# Altium PCB RT-701_V005.PcbDoc (part 2 of 2)
Units mm, origin at the board's own origin, x right, y up, seen from the top; angles counter-clockwise.
Board outline 41.11 x 25.65 mm, 4 copper layers (Top Layer, Signal Layer 1, Signal Layer 2, Bottom Layer), stack 0.777 mm thick; 76 components, 63 nets, 332 pads, 90 vias.
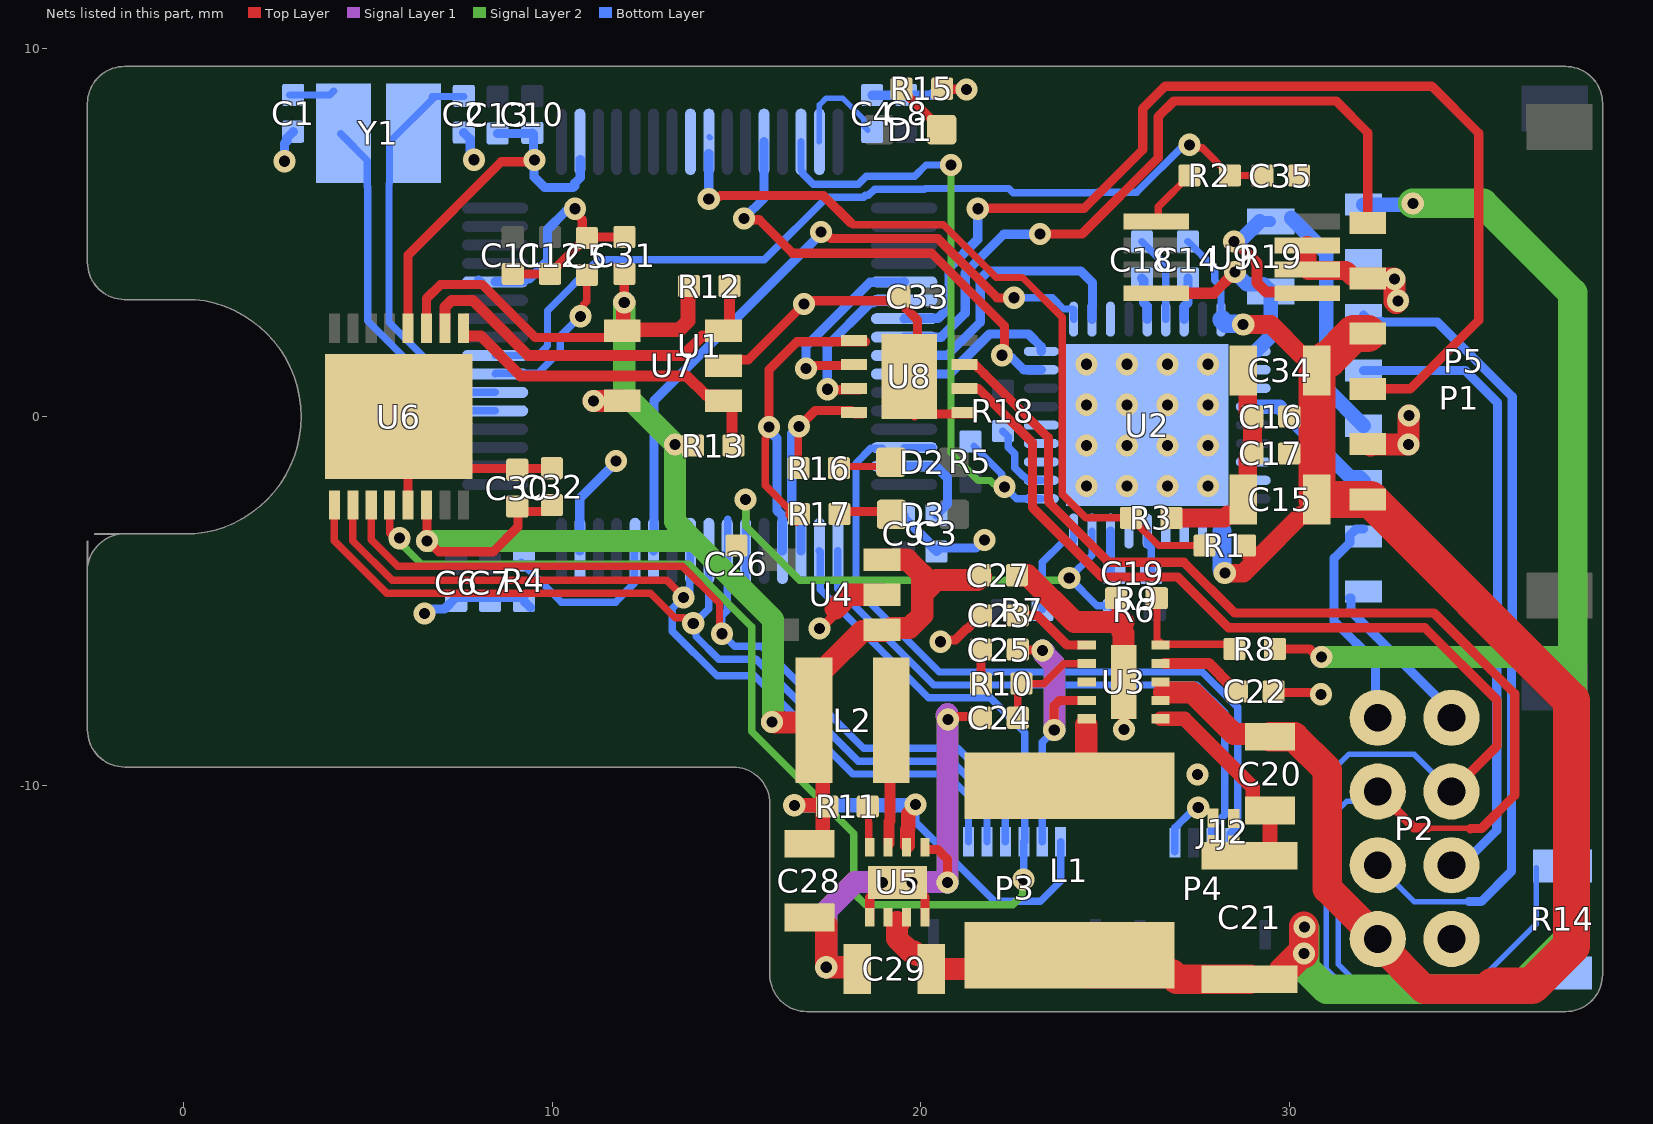
[diagram p4: the nets of this part, all layers, seen from the top]

## Via types
v1: diameter 0.6, hole 0.3, Top Layer to Bottom Layer, tented both sides, 90 vias

## Nets (pads, with @x,y where several pads share a name; then routed paths per layer and width w, separated by ;. In a path a pad name is that pad's centre, name@x,y a point inside that pad or via, vN(x,y) a via of type N, cw(c..) or ccw(c..) an arc to the next point about the centre after c; other vN are vias at no path point) (continued)
5V0: C27.1 C28.1 C30.1 C31.1 C32.1 L2.2 P3.1 R11.1 R12.2 R13.2 U4.1 U4.3 U5.6 U6.3 U6.14 U7.4 | length 62
  Top Layer w0.25: U6.3@6.59,2.4 6.59,3.202 6.972,3.584 8.1,3.584 9.539,2.145 U7.4@11.701,2.145 ; 6.601,-3.062 U6.14@6.601,-2.338 ; v1@6.712,-3.452 6.926,-3.666 8.4,-3.666 9.072,-2.994 9.072,-2.579 9.893,-2.579 C32.1@10.068,-2.404 ; C30.1@9.052,-2.571 C30.1@9.052,-2.444 ; C31.1@11.895,3.795 11.954,3.736 v1(11.954,3.092)
  Top Layer w0.4: U7.4@11.701,2.328 U7.4@11.901,2.328 11.929,2.356 13.449,2.356 13.683,2.591 13.683,3.515 R12.2@13.707,3.539 ; U7.4@11.828,2.328 11.928,2.428 11.928,3.065 v1(11.954,3.092) ; v1(13.335,-0.762) 13.349,-0.776 13.804,-0.776 R13.2@13.817,-0.789 ; v1@16.57,-10.547 R11.1@17.341,-10.547 ; C28.1@16.978,-11.595 17.227,-11.595 17.341,-11.48 R11.1@17.341,-10.547 ; L2.2@17.296,-8.992 17.341,-9.038 R11.1@17.341,-10.547 ; R11.1@17.462,-10.584 17.426,-10.547 R11.1@17.341,-10.547 ; U5.6@19.639,-11.641 19.639,-11.203 19.662,-11.18 19.662,-10.777 19.862,-10.577 v1(19.862,-10.523)
  Top Layer w0.6: v1(15.965,-8.285) 16.035,-8.285 16.05,-8.3 17.042,-8.3 L2.2@17.099,-8.244 17.099,-7.044 17.299,-6.844 17.39,-6.844 18.418,-5.816 U4.1@19.025,-5.816 ; U4.3@18.944,-3.887 19.635,-3.887 20.041,-4.292 20.041,-4.816 ; U4.1@19.189,-5.742 19.689,-5.742 20.041,-5.39 20.041,-4.816 ; C27.1@21.638,-4.335 21.54,-4.433 20.423,-4.433 20.041,-4.816
  Signal Layer 2 w0.6: v1(6.604,-3.381) 13.865,-3.381 ; v1(11.954,3.092) 11.954,0.628 v1@13.307,-0.724 ; v1(13.335,-0.762) 13.335,-2.851 13.865,-3.381 ; v1(15.965,-8.285) 15.992,-8.258 15.992,-5.508 13.865,-3.381
  Bottom Layer w0.2: v1(19.862,-10.523) 19.862,-11.009 22.003,-13.15 23.25,-13.15 23.797,-12.603 P3.1@23.797,-11.534
  Bottom Layer w0.4: v1(16.569,-10.548) 19.837,-10.548 v1(19.862,-10.523)
12V0: C21.1 C29.1 L1.2 P1.1 R8.2 U5.2 U5.3 | length 52.1
  Top Layer w0.25: R8.2@29.613,-6.307 30.555,-6.307 30.777,-6.53 v1(30.872,-6.53)
  Top Layer w0.6: 19.4,-13.764 19.354,-13.717 19.354,-14.168 19.705,-14.52 19.814,-14.52 19.907,-14.612 20.207,-14.612 20.282,-14.687 C29.1@20.282,-14.987 21.481,-14.987 21.631,-14.837 L1.2@21.631,-14.525 ; v1(30.398,-14.573) v1@30.398,-14.554
  Top Layer w0.8: L1.2@24.031,-14.622 24.531,-15.122 26.806,-15.122 26.95,-15.265 C21.1@28.922,-15.265 ; C21.1@29.822,-15.24 29.822,-15.067 30.316,-14.573 v1(30.398,-14.573) ; v1@30.398,-14.554 v1@30.398,-13.831
  Signal Layer 2 w0.6: v1(30.872,-6.53) 37.449,-6.53 37.667,-6.312
  Signal Layer 2 w0.8: v1@30.426,-13.884 30.426,-14.573 30.426,-14.96 31.012,-15.546 36.199,-15.546 37.688,-14.058 37.688,-6.53 37.688,3.357 35.262,5.783 v1(33.351,5.783)
  Bottom Layer w0.4: P1.1@32.014,5.75 33.319,5.75 v1(33.351,5.783)
  other v1: 30.411,-13.851
AD8418_1: R2.1 U9.5 | length 1.6
  Top Layer w0.2: U9.5@26.395,5.295 26.444,5.344 26.444,5.694 R2.1@27.292,6.542
AD8418_1_SENSE1: C35.1 R2.2 U1.8 | length 24.2
  Top Layer w0.2: v1(27.292,7.374) 27.369,7.297 27.637,7.297 R2.2@28.392,6.542 29.262,6.542 C35.1@29.266,6.538
  Bottom Layer w0.2: U1.8@8.45,1.655 9.605,1.655 9.871,1.922 9.871,2.871 11.25,4.25 15.75,4.25 17.455,5.955 18.45,5.955 18.495,6 18.579,6 18.75,6.171 20.098,6.171 20.116,6.189 20.685,6.189 22.392,6.189 22.504,6.076 24.78,6.076 24.795,6.091 25.865,6.091 27.147,7.374 v1(27.292,7.374)
BOOT0: R4.2 U1.60 | length 4.6
  Bottom Layer w0.2: R4.2@9.161,-3.954 10.241,-5.034 11.719,-5.034 12.231,-4.523 12.231,-3.664 U1.60@12.25,-3.645
COMP: C24.1 R10.2 U3.7 | length 3.1
  Top Layer w0.2: C24.1@22.632,-8.174 22.632,-7.199 R10.2@22.657,-7.174 ; R10.2@22.732,-7.248 23.333,-7.248 23.877,-6.705 U3.7@24.603,-6.705
DRV8313_1_EN1: U1.59 U2.1 | length 18.5
  Top Layer w0.25: v1(17.296,5.008) 17.39,5.008 17.565,4.833 20.463,4.833 22.076,3.22 22.531,3.22 v1(22.535,3.223)
  Bottom Layer w0.2: v1@22.543,3.231 v1(22.535,3.223) 23.568,3.223 23.872,2.919 24.124,2.919 24.147,2.896 U2.1@24.147,2.644
  Bottom Layer w0.25: U1.59@12.75,-3.645 12.76,-3.635 12.76,-2.35 12.76,0.43 17.296,4.966 v1(17.296,5.008)
DRV8313_1_EN2: U1.28 U2.35 | length 12.5
  Top Layer w0.25: v1(15.2,5.378) 15.238,5.34 15.617,5.34 16.524,4.433 20.297,4.433 22.276,2.454 v1@22.276,1.84
  Bottom Layer w0.25: v1(15.2,5.378) 15.75,5.928 U1.28@15.75,7.455 ; v1@22.169,1.702 v1(22.207,1.663) 22.274,1.596 22.47,1.596 22.797,1.269 U2.35@23.272,1.269
DRV8313_1_FAULT: R5.2 U1.30 U2.28 | length 17.5
  Signal Layer 2 w0.2: v1(20.82,6.824) 20.82,0.106 20.82,-0.991 21.565,-1.736 21.89,-1.736 21.985,-1.83 22.198,-1.83 v1(22.274,-1.906)
  Bottom Layer w0.2: U1.30@16.75,7.455 16.75,6.678 16.8,6.628 16.8,6.589 17.084,6.305 18.305,6.305 18.521,6.521 19.839,6.521 20.142,6.824 v1(20.82,6.824) ; R5.2@21.447,-0.806 22.198,-1.558 22.198,-1.83 v1(22.274,-1.906) 22.599,-2.231 U2.28@23.272,-2.231
DRV8313_1_IN1: U1.41 U2.2 | length 7.9
  Bottom Layer w0.254: U1.41@19.55,1.655 19.559,1.664 20.717,1.664 21.614,2.561 21.614,3.731 21.833,3.95 24.339,3.95 24.66,3.629 24.66,3.002 24.647,2.99 U2.2@24.647,2.644
DRV8313_1_IN2: U1.42 U2.36 | length 4.4
  Bottom Layer w0.254: U1.42@19.55,1.155 20.78,1.155 21.865,2.24 22.926,2.24 23.272,1.894 U2.36@23.272,1.769
DRV8313_1_RESET: R6.2 U1.54 U2.26 | length 15.5
  Signal Layer 2 w0.2: v1(15.25,-2.25) 15.25,-2.971 16.719,-4.44 23.968,-4.44 v1(24.03,-4.378)
  Bottom Layer w0.2: U1.54@15.2,-4.472 15.25,-4.422 U1.54@15.25,-3.645 v1(15.25,-2.25) ; U2.26@24.647,-3.106 24.647,-3.761 v1(24.03,-4.378) 24.781,-5.13 25.13,-5.13 R6.2@25.25,-5.25
FB/VO: R8.1 R9.2 U3.5 | length 3.2
  Top Layer w0.2: R9.2@26.428,-5.007 26.409,-5.027 26.409,-6.118 U3.5@26.506,-6.118 ; U3.5@26.506,-6.176 28.313,-6.176 28.407,-6.271 R8.1@28.407,-6.339
GND: C1.1 C2.1 C3.2 C4.2 C5.2 C6.2 C7.2 C8.2 C9.2 C10.2 C11.2 C12.2 C13.2 C15.2 C16.2 C17.2 C19.2 C22.2 C23.2 C24.2 C25.2 C26.2 C27.2 C28.2 C29.2 C30.2 C31.2 C32.2 C33.2 C34.2 C35.2 J1.1 J2.1 P1.2 P2.2 P3.2 P4.4 P5.2 P5.5 R3.1 R4.1 R9.1 R15.1 U1.12 U1.18 U1.63 U2.3 U2.11 U2.12 U2.16 U2.17 U2.20 U2.21 U2.22 U2.23 U2.24 U2.30 U2.31 U2.32 U2.37 U3.9 U3.11 U4.2 U5.1 U5.4 U5.5 U5.9 U6.4 U6.13 U6.17 U7.2 U7.5 U8.5 U8.9 U9.2 U9.3 | length 97.9
  Top Layer w0.25: U6.17@5.84,0 7.25,-1.41 C32.2@10.134,-1.41 ; U6.13@6.09,-2.4 6.09,-1.359 U6.17@6.158,-1.291 ; U6.4@6.09,2.4 6.09,4.385 8.618,6.914 9.263,6.914 v1@9.359,7.01 ; C11.2@8.931,3.872 C12.2@9.94,3.872 10.738,4.669 10.765,4.669 C5.2@10.94,4.844 ; v1(10.613,5.639) 10.613,5.544 10.818,5.34 10.818,4.966 C5.2@10.94,4.844 ; C31.2@11.959,4.872 10.967,4.872 C5.2@10.94,4.844 ; U7.2@14.651,1.378 14.814,1.541 15.318,1.541 16.896,3.119 v1@16.954,3.119 ; v1@16.966,3.119 v1@16.954,3.119 ; C28.2@17.136,-13.479 C28.2@17.436,-13.78 ; v1(17.25,-5.75) 17.291,-5.75 17.643,-5.398 17.643,-5.165 ; C29.2@18.238,-14.943 C29.2@18.282,-14.987 ; U5.1@18.614,-13.591 18.614,-13.041 U5.9@18.868,-12.788 ; C33.2@19.417,3.254 19.303,3.139 16.975,3.139 v1@16.954,3.119 ; C33.2@19.437,3.234 19.592,3.079 19.592,2.938 19.912,2.618 U8.9@19.912,1.043 ; U5.9@19.739,-12.666 20.114,-13.041 U5.4@20.114,-13.591 ; U8.9@19.832,0.018 U8.9@19.907,0.092 ; U8.9@19.885,0.114 U8.9@19.907,0.092 ; U8.9@20.065,0.14 19.955,0.14 U8.9@19.907,0.092 ; U5.5@20.114,-11.691 20.114,-11.745 20.452,-11.745 20.723,-12.015 v1(20.723,-12.647) ; v1(20.539,-6.111) 20.59,-6.06 20.942,-6.06 21.253,-5.748 21.282,-5.748 C23.2@21.632,-5.398 ; R15.1@20.582,8.895 20.594,8.883 21.112,8.883 v1@21.155,8.84 ; v1(20.74,-8.219) 20.835,-8.219 20.918,-8.136 21.594,-8.136 C24.2@21.632,-8.174 ; U8.5@21.412,0.068 19.931,0.068 U8.9@19.907,0.092 ; C25.2@22.632,-6.323 22.647,-6.338 23.293,-6.338 v1(23.307,-6.352) ; v1(23.622,-8.509) 23.619,-8.506 23.619,-7.848 23.766,-7.701 U3.9@24.486,-7.701 ; C22.2@29.599,-7.407 29.678,-7.486 v1@30.616,-7.486 ; P5.5@31.763,3.925 P5.5@31.83,3.925
  Top Layer w0.3: R9.1@25.305,-4.929 25.327,-4.951 25.327,-5.89 ; v1(25.511,-8.495) U3.11@25.511,-7.22
  Top Layer w0.508: R3.1@26.8,-2.75 28.25,-2.75 28.329,-2.671 28.629,-2.671 28.75,-2.55 C15.2@28.75,-2.25 28.871,-2.129 28.871,-1.129 C17.2@29,-1 C16.2@29,0 28.871,0.129 28.871,1.129 C34.2@28.75,1.25 ; U9.3@30.485,4.645 U9.2@30.485,3.995 30.515,3.965 31.541,3.965 31.71,3.796 32.085,3.796 P5.5@32.131,3.75
  Top Layer w0.6: v1(11.118,0.422) 11.519,0.422 11.525,0.428 U7.5@11.901,0.428 ; C28.2@17.436,-13.78 v1(17.436,-14.943) C29.2@18.238,-14.943 ; 17.686,-5.208 18.057,-4.837 U4.2@18.944,-4.837 ; C27.2@22.609,-4.306 22.897,-4.306 24.169,-5.578 25.495,-5.578 ; U3.11@25.506,-7.201 25.506,-5.89 ; P5.5@32.131,3.75 32.842,3.75 v1(32.859,3.732) 32.859,3.123 32.898,3.084 v1(32.955,3.141) ; P5.2@32.209,-0.786 32.237,-0.758 v1(33.24,-0.758) 33.24,0.019 v1(33.252,0.031)
  Signal Layer 1 w0.6: v1(17.436,-14.943) 17.436,-13.417 18.219,-12.634 v1@20.607,-12.634 ; v1@20.694,-8.108 20.723,-8.079 v1(20.723,-12.647) ; v1(23.307,-6.352) 23.35,-6.395 23.35,-6.442 23.631,-6.723 23.631,-8.5 v1(23.622,-8.509)
  Bottom Layer w0.2: P3.2@23.297,-11.534 23.297,-8.834 v1(23.622,-8.509) ; U2.23@26.147,-3.106 26.147,-3.47 26.25,-3.572 C19.2@26.25,-4.25 ; P4.4@26.897,-11.812 P4.4@26.897,-11.562 26.897,-11.162 26.997,-11.062 26.997,-11.058 27.144,-10.912 27.147,-10.912 27.445,-10.614 v1(27.53,-10.614)
  Bottom Layer w0.25: v1(2.737,6.927) 2.737,7.408 2.796,7.467 2.796,7.554 C1.1@2.971,7.729 ; v1(6.532,-5.341) 6.626,-5.341 6.746,-5.222 7.079,-5.222 7.395,-4.906 R4.1@9.231,-4.906 ; C2.1@7.601,7.703 7.776,7.528 7.776,7.161 7.874,7.063 v1(7.874,6.969) ; U1.12@8.001,3.701 U1.12@8.073,3.629 ; U1.12@8.45,3.655 9.214,3.655 9.289,3.73 9.376,3.73 9.871,4.225 9.871,5.076 v1@10.367,5.572 ; C13.2@8.521,7.683 9.452,7.683 C10.2@9.489,7.646 ; R4.1@9.231,-5.003 R4.1@9.406,-5.178 ; v1@9.431,6.903 9.51,6.824 9.51,6.498 9.795,6.213 10.567,6.213 10.613,6.259 10.613,6.334 10.763,6.484 10.763,6.656 10.76,6.66 U1.18@10.76,6.976 ; C10.2@9.46,7.696 9.49,7.665 9.49,6.995 v1(9.521,6.964) ; U1.63@10.75,-3.645 10.75,-2.225 11.732,-1.243 v1(11.732,-1.201) ; C4.2@18.68,8.721 20.28,8.721 20.379,8.82 20.403,8.82 ; C9.2@19.538,-2.685 19.538,-2.729 19.852,-3.042 20.048,-3.238 20.252,-3.442 20.252,-3.491 C3.2@20.37,-3.61 ; C3.2@20.427,-3.663 20.522,-3.568 21.491,-3.568 21.719,-3.341 v1(21.729,-3.351)
  other v1: 18.964,-12.641 19.764,-12.641 27.51,-9.71 30.858,-7.537 24.497,-1.881 25.597,-1.881 26.697,-1.881 27.797,-1.881 24.497,-0.781 25.597,-0.781 26.697,-0.781 27.797,-0.781 24.497,0.319 25.597,0.319 26.697,0.319 27.797,0.319 24.497,1.419 25.597,1.419 26.697,1.419 27.797,1.419 16.836,3.059 21.24,8.871
"GPIO4 (LED_PWM_2A)": P5.3 U1.39 | length 29.4
  Top Layer w0.254: v1@21.49,5.65 24.435,5.65 26.023,7.239 26.023,8.356 26.633,8.966 33.866,8.966 35.143,7.688 35.143,2.612 33.281,0.75 P5.3@32.131,0.75
  Bottom Layer w0.254: U1.39@19.55,2.655 19.559,2.664 20.467,2.664 20.766,2.962 20.766,4.025 21.543,4.803 v1@21.543,5.634
  other v1: 21.548,5.639
"GPIO5 (LED_PWM_2B)": P5.6 U1.40 | length 19.8
  Top Layer w0.254: v1(23.235,4.952) 24.376,4.952 26.447,7.023 26.447,8.139 26.87,8.562 31.272,8.562 32.131,7.703 P5.6@32.131,5.25 31.931,5.25 P5.6@31.758,5.423
  Bottom Layer w0.254: U1.40@19.55,2.155 20.558,2.155 21.21,2.808 21.21,3.899 22.255,4.944 v1@23.226,4.944
ICMU_1_MISO: P3.5 U1.56 U6.9 | length 25.1
  Top Layer w0.2: U6.9@4.09,-2.4 4.09,-3.371 5.51,-4.791 12.666,-4.791 13.333,-5.458 13.567,-5.458 13.718,-5.61 v1(13.826,-5.61)
  Bottom Layer w0.2: U1.56@14.25,-3.645 14.25,-5.214 13.855,-5.61 v1(13.826,-5.61) 13.903,-5.686 13.903,-5.969 14.518,-6.584 15.537,-6.584 18.303,-9.35 20.845,-9.35 21.797,-10.302 P3.5@21.797,-11.534
ICMU_1_MOSI: P3.6 U1.57 U6.10 | length 24.2
  Top Layer w0.2: U6.10@4.59,-2.4 4.59,-3.376 5.655,-4.441 13.106,-4.441 v1@13.567,-4.902
  Bottom Layer w0.2: U1.57@13.75,-3.645 13.75,-4.331 13.732,-4.349 13.732,-4.814 13.606,-4.94 13.593,-4.94 v1(13.561,-4.908) 13.262,-5.207 13.262,-5.823 14.47,-7.032 15.489,-7.032 18.158,-9.7 20.7,-9.7 21.297,-10.297 P3.6@21.297,-11.534
ICMU_1_NCS: P3.3 U1.50 U6.12 | length 37.5
  Top Layer w0.2: U6.12@5.59,-2.4 5.59,-3.165 5.726,-3.301 v1(5.859,-3.301)
  Signal Layer 2 w0.2: v1(5.859,-3.301) 5.859,-3.409 6.054,-3.605 6.054,-3.609 6.445,-4 13.706,-4 15.415,-5.709 15.415,-8.546 18.184,-11.316 18.184,-12.934 18.5,-13.25 22.5,-13.25 22.76,-12.99 22.76,-12.591 v1(22.785,-12.566)
  Bottom Layer w0.2: U1.50@17.25,-3.645 17.269,-3.664 17.269,-4.693 20.209,-7.633 21.883,-7.633 22.825,-8.575 P3.3@22.825,-11.534 ; v1(22.785,-12.566) 22.797,-12.555 P3.3@22.797,-11.534
ICMU_1_SCK: P3.4 U1.55 U6.11 | length 25.9
  Top Layer w0.2: U6.11@5.09,-2.4 5.09,-3.346 5.81,-4.066 13.532,-4.066 14.539,-5.073 14.539,-5.827 v1(14.606,-5.894)
  Bottom Layer w0.2: U1.55@14.76,-2.784 14.76,-3.635 U1.55@14.75,-3.645 14.75,-5.265 14.606,-5.409 v1(14.606,-5.894) 14.946,-6.234 15.681,-6.234 18.448,-9 21,-9 22.297,-10.297 P3.4@22.297,-11.534
LX: L1.1 U3.10 | length 1.8
  Top Layer w0.6: L1.1@24.031,-10.022 24.491,-9.562 24.491,-8.369
M1_OUTA: R19.1 U2.10 U9.8 | length 5.4
  Top Layer w0.3: U9.8@26.395,3.345 27.951,3.345 v1(28.523,3.918)
  Bottom Layer w0.4: v1(28.523,3.918) 28.849,3.593 29.296,3.593 R19.1@29.496,3.393 29.496,2.176 U2.10@29.082,1.762
MOTOR1_OUTA: P1.5 R19.2 U9.1 | length 10.6
  Top Layer w0.3: v1(28.5,4.75) 28.54,4.75 29.123,4.166 29.123,3.627 29.251,3.499 29.374,3.376 30.454,3.376 U9.1@30.485,3.345
  Bottom Layer w0.3: v1(28.5,4.75) 28.557,4.807 v1@28.71,4.807 ; R19.2@29.196,5.293 R19.2@29.496,5.293
  Bottom Layer w0.4: v1@28.71,4.807 R19.2@29.196,5.293 ; R19.2@30.05,5.387 31,4.437 31,0.764 P1.5@32.014,-0.25
MOTOR1_OUTB: P1.6 U2.13 | length 3.8
  Bottom Layer w0.4: U2.13@29.022,0.269 29.731,0.269 31.65,-1.65 31.914,-1.65 P1.6@32.014,-1.75
NetC3_1: C3.1 U1.47 | length 2.4
  Bottom Layer w0.254: U1.47@19.55,-1.345 19.559,-1.354 20.415,-1.354 20.727,-1.666 20.727,-2.022 20.727,-2.363 C3.1@20.427,-2.663
NetC4_1: C4.1 U1.31 | length 2.8
  Bottom Layer w0.15: U1.31@17.25,7.455 17.25,8.454 17.436,8.64 17.878,8.64 18.455,8.063 18.455,7.878 C4.1@18.557,7.775
NetC14_2: C14.2 U2.7 | length 1.1
  Bottom Layer w0.254: U2.7@27.147,2.644 27.147,2.99 27.25,3.092 C14.2@27.25,3.75
NetC18_1: C18.1 U2.5 | length 1.2
  Bottom Layer w0.254: C18.1@26,3.75 26.048,3.702 26.048,3.089 26.147,2.99 U2.5@26.147,2.644
NetC18_2: C18.2 U2.6 | length 2.4
  Bottom Layer w0.2: C18.2@26,4.75 26.647,4.103 U2.6@26.647,2.644
NetC19_1: C19.1 U2.25 | length 1.3
  Bottom Layer w0.25: C19.1@25.147,-4.422 U2.25@25.147,-3.106
NetC25_1: C25.1 R10.1 | length 0.9
  Top Layer w0.25: C25.1@21.632,-6.323 21.632,-7.188 R10.1@21.687,-7.243
NetD1_1: D1.1 R15.2 | length 1.6
  Top Layer w0.25: R15.2@19.482,8.895 19.657,8.72 19.657,8.692 20.475,7.874 D1.1@20.475,7.73
NetD2_1: D2.1 R16.2 | length 1.4
  Top Layer w0.2: R16.2@17.825,-1.355 19.071,-1.355 D2.1@19.191,-1.235
NetD3_1: D3.1 R17.2 | length 1.5
  Top Layer w0.25: R17.2@17.795,-2.647 17.867,-2.575 19.128,-2.575 D3.1@19.21,-2.656
NetL2_1: L2.1 U5.7 | length 2.2
  Top Layer w0.3: U5.7@19.139,-11.591 19.139,-10.996 19.162,-10.973 19.162,-9.387 L2.1@19.17,-9.379
NetR7_2: R7.2 U2.27 | length 2.6
  Bottom Layer w0.2: R7.2@23.3,-5.25 23.3,-3.954 23.872,-3.382 24.124,-3.382 24.147,-3.359 U2.27@24.147,-3.106
NetR11_2: R11.2 U5.8 | length 1.3
  Top Layer w0.2: R11.2@18.418,-10.592 18.582,-10.756 18.582,-11.018 18.589,-11.025 18.589,-11.432 18.589,-11.788 U5.8@18.62,-11.818
NetR18_2: R18.2 U2.29 | length 2
  Bottom Layer w0.2: R18.2@22.229,-0.395 22.377,-0.543 22.377,-0.836 22.547,-1.006 22.547,-1.387 22.767,-1.606 22.784,-1.606 22.909,-1.731 U2.29@23.272,-1.731
NRST: C5.1 U1.7 | length 4.7
  Top Layer w0.2: C5.1@10.749,3.653 C5.1@10.94,3.844 10.94,3.127 10.84,3.028 10.84,2.797 v1(10.763,2.72)
  Bottom Layer w0.2: U1.7@8.45,1.155 8.466,1.171 9.615,1.171 10.221,1.777 10.221,2.178 v1(10.763,2.72)
OSC_IN: C1.2 U1.5 Y1.2 | length 11.1
  Bottom Layer w0.2: C1.2@2.873,8.725 3.961,8.725 Y1.2@4.069,8.832 ; Y1.2@4.258,7.676 4.986,6.949 4.986,6.24 4.995,6.23 4.995,2.592 7.432,0.155 U1.5@8.45,0.155
OSC_OUT: C2.2 U1.6 Y1.1 | length 11.1
  Bottom Layer w0.2: Y1.1@6.747,8.686 C2.2@7.601,8.686 ; Y1.1@6.808,8.672 5.586,7.449 5.586,6.331 5.571,6.317 5.571,2.562 7.471,0.662 8.443,0.662 U1.6@8.45,0.655
PGND: C20.2 C21.2 J1.2 J2.2 U3.1 | length 5.7
  Top Layer w0.4: U3.1@26.506,-8.201 27.154,-8.201 29.01,-10.057 29.01,-10.514 29.185,-10.689 C20.2@29.477,-10.689 29.477,-11.747 C21.2@29.247,-11.977
RESET: U3.8
RS485_A: P2.6 R14.2 U8.6 | length 38.1
  Top Layer w0.25: U8.6@21.19,0.764 21.561,0.764 23.032,-0.707 23.032,-2.467 24.919,-4.354 26.975,-4.354 28.353,-5.731 33.676,-5.731 35.639,-7.694 35.639,-8.938 P2.6@34.401,-10.176
  Bottom Layer w0.15: P2.6@34.401,-10.176 33.388,-9.163 31.992,-9.163 31.991,-9.162 31.626,-9.162 31.006,-9.781 31.006,-14.991 31.603,-15.588 36.599,-15.588 36.686,-15.5 36.686,-15.471 37.061,-15.096 R14.2@37.411,-15.096
RS485_B: P2.5 R14.1 U8.7 | length 40.1
  Top Layer w0.15: 33.752,-11.17 34.906,-11.17 34.919,-11.183
  Top Layer w0.25: U8.7@21.19,1.414 21.469,1.414 21.719,1.164 21.727,1.164 23.464,-0.574 23.464,-2.265 23.485,-2.286 23.485,-2.338 25.101,-3.954 27.141,-3.954 28.518,-5.331 33.925,-5.331 36.117,-7.523 36.117,-10.278 35.216,-11.179 34.923,-11.179 34.919,-11.183 ; P2.5@32.401,-10.176 33.383,-11.158 33.752,-11.158
  Bottom Layer w0.15: P2.5@32.401,-10.176 32.144,-10.433 31.562,-10.433 31.325,-10.67 31.325,-14.858 31.755,-15.288 35.18,-15.288 36.698,-13.77 R14.1@36.698,-12.245
RX_+: P1.7 P2.7 | length 6.1
  Bottom Layer w0.25: P1.7@32.014,-3.05 31.814,-3.05 31.639,-3.225 31.639,-3.425 31.216,-3.848 31.216,-5.553 32.339,-6.676 32.339,-8.114 P2.7@32.401,-8.176
RX_-: P1.8 P2.8 | length 4.4
  Bottom Layer w0.25: P1.8@31.639,-4.925 31.672,-4.925 31.672,-5.279 34.401,-8.007 P2.8@34.401,-8.176
SCL: R13.1 U6.1 U7.1 | length 9.1
  Top Layer w0.3: U6.1@7.59,2.4 7.59,2.183 8.067,2.183 9.146,1.104 13.645,1.104 14.17,0.578 14.501,0.578 U7.1@14.651,0.428 ; U7.1@14.884,0.337 14.884,-0.756 R13.1@14.917,-0.789
SDA: R12.1 U6.2 U7.3 | length 10.4
  Top Layer w0.3: U6.2@7.09,2.4 7.09,2.971 7.266,3.147 7.853,3.147 9.345,1.655 13.548,1.655 14.071,2.178 14.501,2.178 U7.3@14.651,2.328 ; R12.1@14.807,3.539 14.807,2.336 U7.3@14.87,2.273
SPARE: U1.24
SS: C23.1 U3.6 | length 2.2
  Top Layer w0.25: C23.1@22.632,-5.398 23.166,-5.398 23.969,-6.201 U3.6@24.467,-6.201
SWDCLK: P4.2 U1.49 | length 16.6
  Bottom Layer w0.2: U1.49@17.75,-3.645 17.75,-4.679 20.354,-7.283 27.496,-7.283 28.25,-8.037 28.25,-10.805 27.997,-11.058 27.997,-11.062 27.897,-11.162 P4.2@27.897,-11.562
SWDIO: P4.1 U1.46 | length 20.5
  Bottom Layer w0.2: U1.46@18.962,-0.864 18.643,-0.864 18.242,-1.264 18.242,-4.677 20.499,-6.933 27.641,-6.933 28.505,-7.797 28.6,-7.892 28.6,-11.109 28.397,-11.312 P4.1@28.397,-11.562 ; U1.46@19.55,-0.845 U1.46@20.327,-0.845
TTL_RX1: R17.1 U1.52 U8.1 | length 11.1
  Top Layer w0.2: v1@15.852,-0.349 v1@15.957,-0.454 ; v1@15.876,-0.31 15.808,-0.378 15.808,-0.569 15.778,-0.599 15.778,-1.867 16.434,-2.523 16.434,-2.676 R17.1@16.634,-2.876
  Top Layer w0.25: v1(15.884,-0.282) 15.884,1.274 16.64,2.03 U8.1@18.503,2.03
  Bottom Layer w0.25: v1(15.884,-0.282) 15.884,-0.376 16.101,-0.594 16.101,-2.548 16.24,-2.686 16.24,-3.635 U1.52@16.25,-3.645
TTL_RXE: U1.37 U8.2 | length 5.6
  Top Layer w0.25: v1(16.883,1.309) 16.978,1.309 17.05,1.381 U8.2@18.42,1.381
  Bottom Layer w0.25: v1(16.883,1.309) 16.883,1.381 16.886,1.385 16.886,1.908 18.624,3.645 19.54,3.645 U1.37@19.55,3.655
TTL_TX1: R16.1 U1.51 U8.4 | length 6.6
  Top Layer w0.2: R16.1@16.678,-1.401 16.678,-0.342 v1@16.697,-0.323 ; v1@16.706,-0.265 16.731,-0.289 v1@16.783,-0.341
  Top Layer w0.25: v1(16.7,-0.265) 16.706,-0.265 17.136,0.165 18.115,0.165 18.212,0.068 U8.4@18.412,0.068
  Bottom Layer w0.25: v1@16.501,-0.463 16.501,-2.382 16.75,-2.63 U1.51@16.75,-3.645 ; v1(16.7,-0.265) 16.734,-0.299 v1@16.855,-0.299
TTL_TXE: U1.38 U8.3 | length 4.7
  Top Layer w0.25: v1(17.466,0.74) 17.478,0.728 U8.3@18.336,0.728
  Bottom Layer w0.25: v1(17.466,0.74) 17.466,1.922 18.624,3.08 18.711,3.08 18.786,3.155 U1.38@19.55,3.155
TX_+: P1.3 P2.3 | length 22.2
  Bottom Layer w0.15: P2.3@32.401,-12.176 33.387,-13.162 34.368,-13.162 ccw(c34.401,-12.176) 34.434,-13.162 34.88,-13.162
  Bottom Layer w0.25: P1.3@32.014,2.75 32.189,2.575 32.526,2.575 32.535,2.566 34.018,2.566 34.934,1.65 34.941,1.65 36.052,0.539 36.052,-6.593 36.029,-6.616 36.029,-12.338 35.204,-13.162 34.88,-13.162
TX_-: P1.4 P2.4 | length 17
  Bottom Layer w0.25: P1.4@32.014,1.25 34.775,1.25 35.652,0.373 35.652,-6.427 35.629,-6.45 35.629,-11.227 P2.4@34.623,-12.233
VCC: C22.1 U3.4 | length 2.3
  Top Layer w0.3: U3.4@26.606,-6.704 27.819,-6.704 28.425,-7.309 28.534,-7.309 C22.1@28.604,-7.378
VM: C14.1 C15.1 C16.1 C17.1 C20.1 C34.1 P2.1 P5.1 P5.4 R1.2 U2.9 U2.19 U3.2 U3.3 | length 48.2
  Top Layer w0.508: v1(28.25,-4.25) 28.75,-4.25 29.112,-3.888 ; v1(28.75,2.5) 29.5,2.5 30.329,1.671 ; R1.2@28.8,-3.5 28.846,-3.546 28.846,-3.621 29.112,-3.888 ; C15.1@30.75,-2.25 30.75,-2.55 30.629,-2.671 30.329,-2.671 29.112,-3.888
  Top Layer w0.6: 26.604,-7.487 27.376,-7.487 28.502,-8.614 29.402,-8.614 C20.1@29.477,-8.689
  Top Layer w0.8: C20.1@29.477,-8.689 30.129,-8.689 31.032,-9.593 31.032,-12.807 P2.1@32.401,-14.176 32.401,-14.276 33.671,-15.546 35.444,-15.546 35.544,-15.446
  Top Layer w1: P5.4@32.131,2.25 31.75,2.25 31.05,1.55 31,1.55 30.75,1.3 C34.1@30.75,1.25 C15.1@30.75,-2.25 P5.1@32.131,-2.25 32.203,-2.25 37.654,-7.701 37.654,-14.371 36.579,-15.446 35.544,-15.446
  Bottom Layer w0.2: C14.1@27.25,4.75 27.973,4.027 27.973,3.69 28.147,3.516 U2.9@28.147,2.644
  Bottom Layer w0.508: U2.19@28.176,-3.106 28.176,-4.152 28.25,-4.225 v1(28.25,-4.25) ; U2.9@28.176,2.644 28.176,2.618 28.276,2.518 28.732,2.518 v1(28.75,2.5)
VSUP: R1.1 R3.2 U1.25 | length 21.5
  Top Layer w0.2: 18.106,5.25 18.149,5.208 20.618,5.208 22.053,3.773 22.763,3.773 23.839,2.697 23.839,-2.109 24.48,-2.75 R3.2@25.7,-2.75 26.45,-3.5 R1.1@27.7,-3.5
  Top Layer w0.25: v1(14.248,5.903) 14.315,5.97 14.539,5.97 14.569,6 17.356,6 18.106,5.25
  Bottom Layer w0.15: U1.25@14.257,7.594 U1.25@14.281,7.571
  Bottom Layer w0.25: v1(14.248,5.903) U1.25@14.248,7.134
pads on no net: D1.0 D2.0 D3.0 P1.9 P1.10 P3.7 P3.8 P4.5 P4.6 P5.7 P5.8 U1.2 U1.3 U1.4 U1.9 U1.10 U1.11 U1.14 U1.15 U1.16 U1.17 U1.20 U1.21 U1.22 U1.23 U1.26 U1.27 U1.29 U1.33 U1.34 U1.35 U1.36 U1.43 U1.44 U1.45 U1.53 U1.58 U1.61 U1.62 U2.4 U2.8 U2.14 U2.15 U2.18 U2.33 U2.34 U4.4 U6.5 U6.6 U6.7 U6.8 U6.15 U6.16 U9.4

## Polygon pours and split planes (outlines as drawn)
GND on Top Layer "TOP_GND_Pour" (solid, remove dead copper, pour order 13): -2.61,-8.505 -2.61,-3.391 cw(c-2.605,-3.391) -2.6,-3.391 -2.6,-4.044 cw(c-1.605,-4.191) -1.751,-3.196 -2.405,-3.196 cw(c-2.405,-3.191) -2.405,-3.186 0.285,-3.186 ccw(c0.285,-2.991) 0.304,-3.185 ccw(c0.285,-2.991) 0.304,-3.185 cw(c0.305,-3.19) 0.304,-3.185 ccw(c-0.005,-0.005) 3.19,-0.005 ccw(c-0.005,-0.005) 0.304,3.175 ccw(c-0.005,-0.005) 0.304,3.175 cw(c0.305,3.18) 0.304,3.175 cw(c0.285,2.981) 0.304,3.175 ccw(c0.305,3.18) 0.304,3.175 ccw(c0.285,2.981) 0.285,3.176 -1.605,3.176 cw(c-1.605,3.181) -1.606,3.176 cw(c-1.605,4.181) -2.61,4.181 -2.61,8.495 cw(c-1.605,8.495) -1.605,9.5 37.495,9.5 cw(c37.495,9.495) 37.495,9.5 cw(c37.495,8.495) 38.5,8.495 cw(c38.495,8.495) 38.5,8.495 38.5,-15.141 ccw(c38.495,-15.141) 38.5,-15.141 cw(c37.495,-15.141) 37.497,-16.146 cw(c37.495,-16.141) 37.495,-16.147 16.909,-16.147 cw(c16.909,-16.141) 16.907,-16.146 cw(c16.909,-15.141) 15.904,-15.143 cw(c15.909,-15.141) 15.903,-15.141 15.904,-10.505 ccw(c14.909,-10.505) 14.909,-9.51 -1.605,-9.51 cw(c-1.605,-9.505) -1.605,-9.51 cw(c-1.605,-8.505)
GND on Top Layer "TOP_Gnd-Pgnd" (solid, remove dead copper, pour order 17): 27.159,-10.138 28.509,-10.138 28.623,-10.252 28.623,-10.954 28.615,-10.979 27.138,-10.979 27.092,-10.933 27.092,-10.205
GND on Signal Layer 1 "Sig1_GND_Plane" (solid, remove dead copper, pour order 14): -2.61,-8.505 -2.61,-3.391 cw(c-2.605,-3.391) -2.6,-3.391 -2.6,-4.044 cw(c-1.605,-4.191) -1.751,-3.196 -2.405,-3.196 cw(c-2.405,-3.191) -2.405,-3.186 0.285,-3.186 ccw(c0.285,-2.991) 0.304,-3.185 ccw(c0.285,-2.991) 0.304,-3.185 cw(c0.305,-3.19) 0.304,-3.185 ccw(c-0.005,-0.005) 3.19,-0.005 ccw(c-0.005,-0.005) 0.304,3.175 ccw(c-0.005,-0.005) 0.304,3.175 cw(c0.305,3.18) 0.304,3.175 cw(c0.285,2.981) 0.304,3.175 ccw(c0.305,3.18) 0.304,3.175 ccw(c0.285,2.981) 0.285,3.176 -1.605,3.176 cw(c-1.605,3.181) -1.606,3.176 cw(c-1.605,4.181) -2.61,4.181 -2.61,8.495 cw(c-1.605,8.495) -1.605,9.5 37.495,9.5 cw(c37.495,9.495) 37.495,9.5 cw(c37.495,8.495) 38.5,8.495 cw(c38.495,8.495) 38.5,8.495 38.5,-15.141 ccw(c38.495,-15.141) 38.5,-15.141 cw(c37.495,-15.141) 37.497,-16.146 cw(c37.495,-16.141) 37.495,-16.147 16.909,-16.147 cw(c16.909,-16.141) 16.907,-16.146 cw(c16.909,-15.141) 15.904,-15.143 cw(c15.909,-15.141) 15.903,-15.141 15.904,-10.505 ccw(c14.909,-10.505) 14.909,-9.51 -1.605,-9.51 cw(c-1.605,-9.505) -1.605,-9.51 cw(c-1.605,-8.505)
3V3 on Signal Layer 2 "lAYER2_3v3_pour" (solid, remove dead copper, pour order 16): -2.61,-8.505 -2.61,-3.391 cw(c-2.605,-3.391) -2.6,-3.391 -2.6,-4.044 cw(c-1.605,-4.191) -1.751,-3.196 -2.405,-3.196 cw(c-2.405,-3.191) -2.405,-3.186 0.285,-3.186 ccw(c0.285,-2.991) 0.304,-3.185 ccw(c0.285,-2.991) 0.304,-3.185 cw(c0.305,-3.19) 0.304,-3.185 ccw(c-0.005,-0.005) 3.19,-0.005 ccw(c-0.005,-0.005) 0.304,3.175 ccw(c-0.005,-0.005) 0.304,3.175 cw(c0.305,3.18) 0.304,3.175 cw(c0.285,2.981) 0.304,3.175 ccw(c0.305,3.18) 0.304,3.175 ccw(c0.285,2.981) 0.285,3.176 -1.605,3.176 cw(c-1.605,3.181) -1.606,3.176 cw(c-1.605,4.181) -2.61,4.181 -2.61,8.495 cw(c-1.605,8.495) -1.605,9.5 37.495,9.5 cw(c37.495,9.495) 37.495,9.5 cw(c37.495,8.495) 38.5,8.495 cw(c38.495,8.495) 38.5,8.495 38.5,-15.141 ccw(c38.495,-15.141) 38.5,-15.141 cw(c37.495,-15.141) 37.497,-16.146 cw(c37.495,-16.141) 37.495,-16.147 16.909,-16.147 cw(c16.909,-16.141) 16.907,-16.146 cw(c16.909,-15.141) 15.904,-15.143 cw(c15.909,-15.141) 15.903,-15.141 15.904,-10.505 ccw(c14.909,-10.505) 14.909,-9.51 -1.605,-9.51 cw(c-1.605,-9.505) -1.605,-9.51 cw(c-1.605,-8.505)
GND on Bottom Layer "btm_gnd_pOUR" (solid, remove dead copper, pour order 15): -2.61,-8.505 -2.61,-3.391 cw(c-2.605,-3.391) -2.6,-3.391 -2.6,-4.044 cw(c-1.605,-4.191) -1.751,-3.196 -2.405,-3.196 cw(c-2.405,-3.191) -2.405,-3.186 0.285,-3.186 ccw(c0.285,-2.991) 0.304,-3.185 ccw(c0.285,-2.991) 0.304,-3.185 cw(c0.305,-3.19) 0.304,-3.185 ccw(c-0.005,-0.005) 3.19,-0.005 ccw(c-0.005,-0.005) 0.304,3.175 ccw(c-0.005,-0.005) 0.304,3.175 cw(c0.305,3.18) 0.304,3.175 cw(c0.285,2.981) 0.304,3.175 ccw(c0.305,3.18) 0.304,3.175 ccw(c0.285,2.981) 0.285,3.176 -1.605,3.176 cw(c-1.605,3.181) -1.606,3.176 cw(c-1.605,4.181) -2.61,4.181 -2.61,8.495 cw(c-1.605,8.495) -1.605,9.5 37.495,9.5 cw(c37.495,9.495) 37.495,9.5 cw(c37.495,8.495) 38.5,8.495 cw(c38.495,8.495) 38.5,8.495 38.5,-15.141 ccw(c38.495,-15.141) 38.5,-15.141 cw(c37.495,-15.141) 37.497,-16.146 cw(c37.495,-16.141) 37.495,-16.147 16.909,-16.147 cw(c16.909,-16.141) 16.907,-16.146 cw(c16.909,-15.141) 15.904,-15.143 cw(c15.909,-15.141) 15.903,-15.141 15.904,-10.505 ccw(c14.909,-10.505) 14.909,-9.51 -1.605,-9.51 cw(c-1.605,-9.505) -1.605,-9.51 cw(c-1.605,-8.505)

## Keep-outs
Keep-Out Layer:
  circle w0.15: c24.003,8.001 r1.6
  circle w0.15: c12.4,-8.001 r1.6
  pour cut-out: 15.201,-6.475 15.201,-8.126 15.201,-9.777 15.201,-10.158 15.582,-10.158 19.9,-10.158 19.9,-6.729 19.9,-6.475 19.519,-6.475
  pour cut-out: 27.375,-9.057 27.375,-16.129 20.971,-16.058 20.971,-9.057

## Other copper
Top Layer:
  pour cut-out: 3.249,9.054 3.249,6.108 3.432,5.926 7.104,5.926 7.269,6.091 7.269,9.526 7.404,9.526 7.404,6.015 7.174,5.786 3.367,5.786 3.124,6.029 3.124,9.054
Signal Layer 1:
  pour cut-out: 3.249,9.054 3.249,6.108 3.432,5.926 7.104,5.926 7.269,6.091 7.269,9.526 7.404,9.526 7.404,6.015 7.174,5.786 3.367,5.786 3.124,6.029 3.124,9.054
Signal Layer 2:
  pour cut-out: 3.249,9.054 3.249,6.108 3.432,5.926 7.104,5.926 7.269,6.091 7.269,9.526 7.404,9.526 7.404,6.015 7.174,5.786 3.367,5.786 3.124,6.029 3.124,9.054
Bottom Layer:
  pour cut-out: 3.249,9.054 3.249,6.108 3.432,5.926 7.104,5.926 7.269,6.091 7.269,9.526 7.404,9.526 7.404,6.015 7.174,5.786 3.367,5.786 3.124,6.029 3.124,9.054

## Silkscreen, mask and mechanical layers (free items; w line width, h text height)
Top Overlay:
  drawing of 156 lines, arcs and shapes, not listed
  text "3V3" at 18.31,5.73 h1
  text "RT-701_V005_20220118" at -2.294,5.169 h0.8
  text "LED" at 37.977,-0.234 h1 r90
  text "TX" at 22.144,-1.78 h1
  text "RX" at 22.213,-3.13 h1
  text "1" at 37.732,-3.5 h1 r90
  text "INPUT" at 31.622,-13.063 h0.8 r90
  text "1" at 31.566,-15.676 h1 r90
Bottom Overlay:
  circle w0.15: c12.4,-8.001 r1.7
  circle w0.15: c24.003,8.001 r1.7
  lines w0.15: 20.028,-11.227 20.028,-9.436 20.426,-9.039 24.629,-9.039 25.047,-9.456 25.047,-11.184 ; 25.629,-11.254 25.629,-9.464 26.027,-9.066 29.23,-9.066 29.647,-9.484 29.647,-11.212
  text "1" at 37.756,6.46 h1 r90
  text "CAMERA" at 38.339,2.869 h0.8 r90
  text "MOTOR" at 37.147,2.343 h0.8 r90
  text "8" at 37.756,-4.876 h1 r90
  text "ICMU" at 24.5,-10.75 h1
  text "SWD" at 29.272,-10.75 h1
  text "485 TR" at 36.44,-11.062 h0.8 r90
Mechanical 1:
  circle w0.01: c23.995,7.995 r0.8
  circle w0.01: c12.395,-8.005 r0.8
  circle w0.01: c12.395,-8.005 r0.8
  circle w0.01: c23.995,7.995 r0.8
  lines w0.01: 15.909,-15.941 ccw(c16.109,-15.941) 16.109,-16.141 ; -2.605,-9.305 ccw(c-2.405,-9.305) -2.405,-9.505 ; -2.605,-9.305 ccw(c-2.405,-9.305) -2.405,-9.505 ; -2.605,-9.305 -2.605,-3.391 ; -2.605,-9.305 -2.605,-3.391 ; -2.605,-3.391 cw(c-2.405,-3.391) -2.405,-3.191 ; -2.605,-3.391 cw(c-2.405,-3.391) -2.405,-3.191 ; -2.605,3.381 ccw(c-2.405,3.381) -2.405,3.181 ; -2.605,3.381 ccw(c-2.405,3.381) -2.405,3.181 ; -2.605,3.381 -2.605,9.295 ; -2.605,3.381 -2.605,9.295 ; -2.605,9.295 cw(c-2.405,9.295) -2.405,9.495 ; -2.605,9.295 cw(c-2.405,9.295) -2.405,9.495 ; -2.405,-9.505 15.709,-9.505 ; -2.405,-9.505 15.709,-9.505 ; -2.405,-3.191 0.285,-3.191 ; -2.405,-3.191 0.285,-3.191 ; -2.405,3.181 0.285,3.181 ; -2.405,3.181 0.285,3.181 ; -2.405,9.495 28.295,9.495 cw(c28.295,9.295) 28.495,9.295 28.495,-15.941 cw(c28.295,-15.941) 28.295,-16.141 16.109,-16.141 ; -2.405,9.495 25.295,9.495 cw(c25.295,9.295) 25.495,9.295 25.495,-15.941 cw(c25.295,-15.941) 25.295,-16.141 16.109,-16.141 ; 0.285,-3.191 ccw(c0.285,-2.991) 0.305,-3.19 ; 0.285,-3.191 ccw(c0.285,-2.991) 0.305,-3.19 ; 0.285,3.181 cw(c0.285,2.981) 0.305,3.18 ; 0.285,3.181 cw(c0.285,2.981) 0.305,3.18 ; 0.305,-3.19 ccw(c-0.005,-0.005) 0.305,3.18 ; 0.305,-3.19 ccw(c-0.005,-0.005) 0.305,3.18 ; 3.335,-2.41 3.335,2.59 ; 3.335,-2.41 8.335,-2.41 ; 3.335,-2.41 8.335,-2.41 ; 3.335,-2.41 3.335,2.59 ; 3.335,2.59 8.335,2.59 ; 3.335,2.59 8.335,2.59 ; 8.335,-2.41 8.335,2.59 ; 8.335,-2.41 8.335,2.59 ; 15.709,-9.505 cw(c15.709,-9.705) 15.909,-9.705 ; 15.709,-9.505 cw(c15.709,-9.705) 15.909,-9.705 ; 15.909,-15.941 ccw(c16.109,-15.941) 16.109,-16.141 ; 15.909,-15.941 15.909,-9.705 ; 15.909,-15.941 15.909,-9.705
Mechanical 3:
  circle w0.01: c12.395,-8.005 r0.8
  circle w0.01: c23.995,7.995 r0.8
  lines w0.01: 16.909,-16.141 37.495,-16.141 ; 16.909,-16.141 cw(c16.909,-15.141) 15.909,-15.141 15.909,-10.505 ccw(c14.909,-10.505) 14.909,-9.505 -1.605,-9.505 cw(c-1.605,-8.505) -2.605,-8.505 -2.605,-4.191 cw(c-1.605,-4.191) -1.605,-3.191 0.285,-3.191 ccw(c0.285,-2.991) 0.305,-3.19 ccw(c-0.005,-0.005) 0.305,3.18 ccw(c0.285,2.981) 0.285,3.181 -1.605,3.181 cw(c-1.605,4.181) -2.605,4.181 -2.605,8.495 cw(c-1.605,8.495) -1.605,9.495 37.495,9.495 cw(c37.495,8.495) 38.495,8.495 38.495,-15.141 cw(c37.495,-15.141) 37.495,-16.141
Mechanical 29:
  text "ASSEMBLY TOP" at 14.859,10.287 h0.6
Mechanical 31:
  text "ASSEMBLY BOTTOM" at 23.04,10.321 h0.6